# Altium PCB PCB1.PcbDoc
Units mil, origin at the board's own origin, x right, y up, seen from the top; angles counter-clockwise.
Board outline 2945 x 1570 mil, 2 copper layers (Top Layer, Bottom Layer); 85 components, 56 nets, 343 pads, 41 vias.
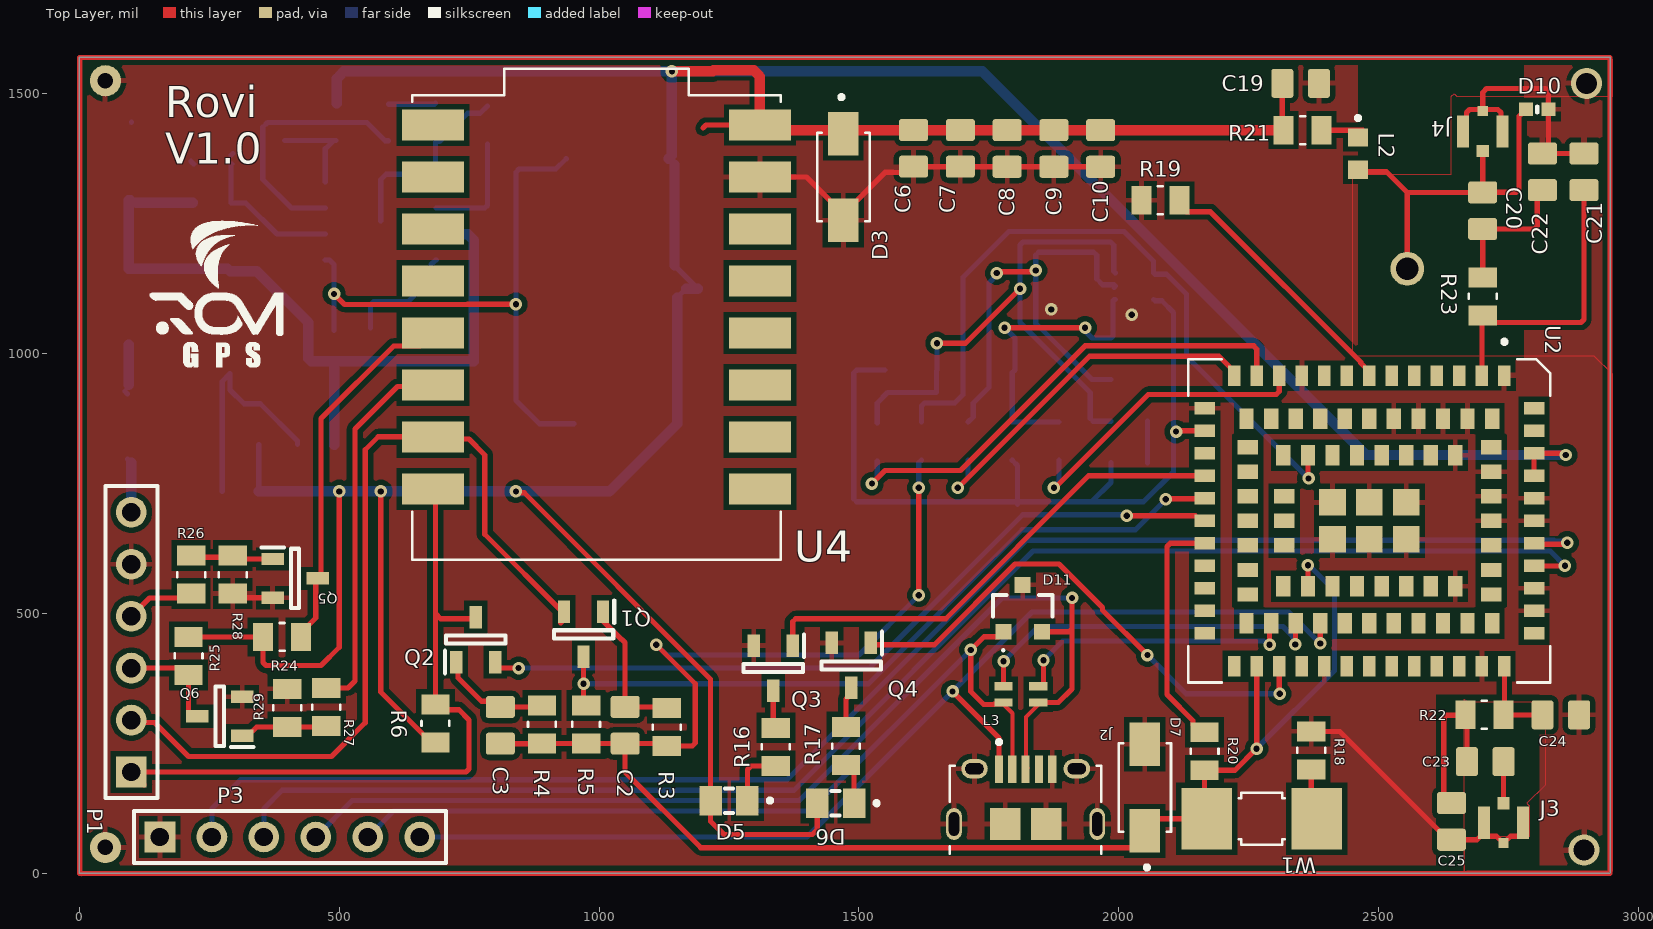
[diagram p0: Top Layer view]
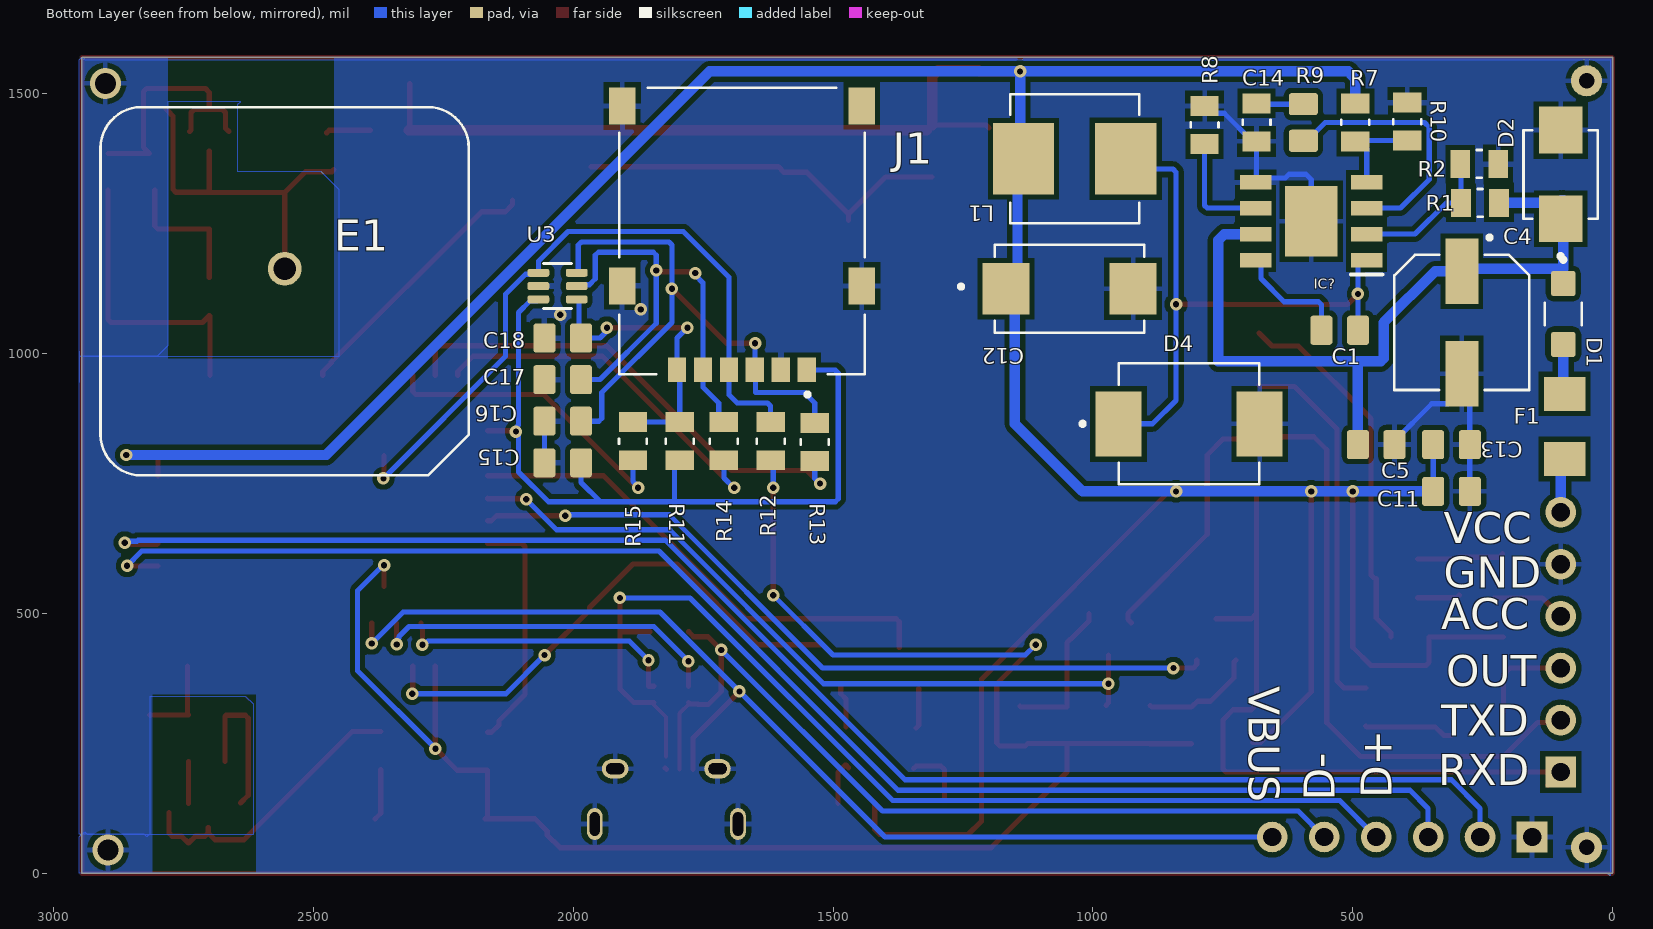
[diagram p1: Bottom Layer view, seen from below]
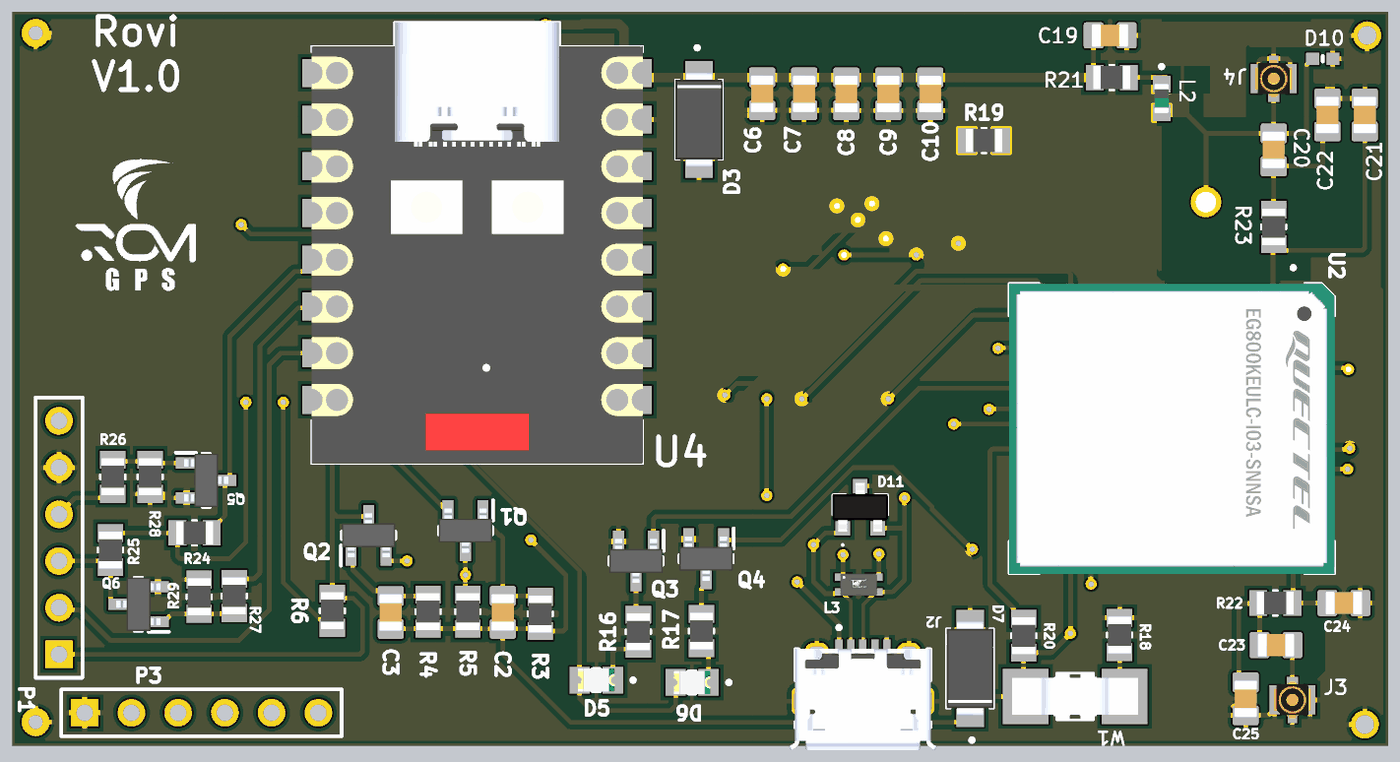
[diagram p2: 3D render of the assembled board from above, using the file's embedded part models]
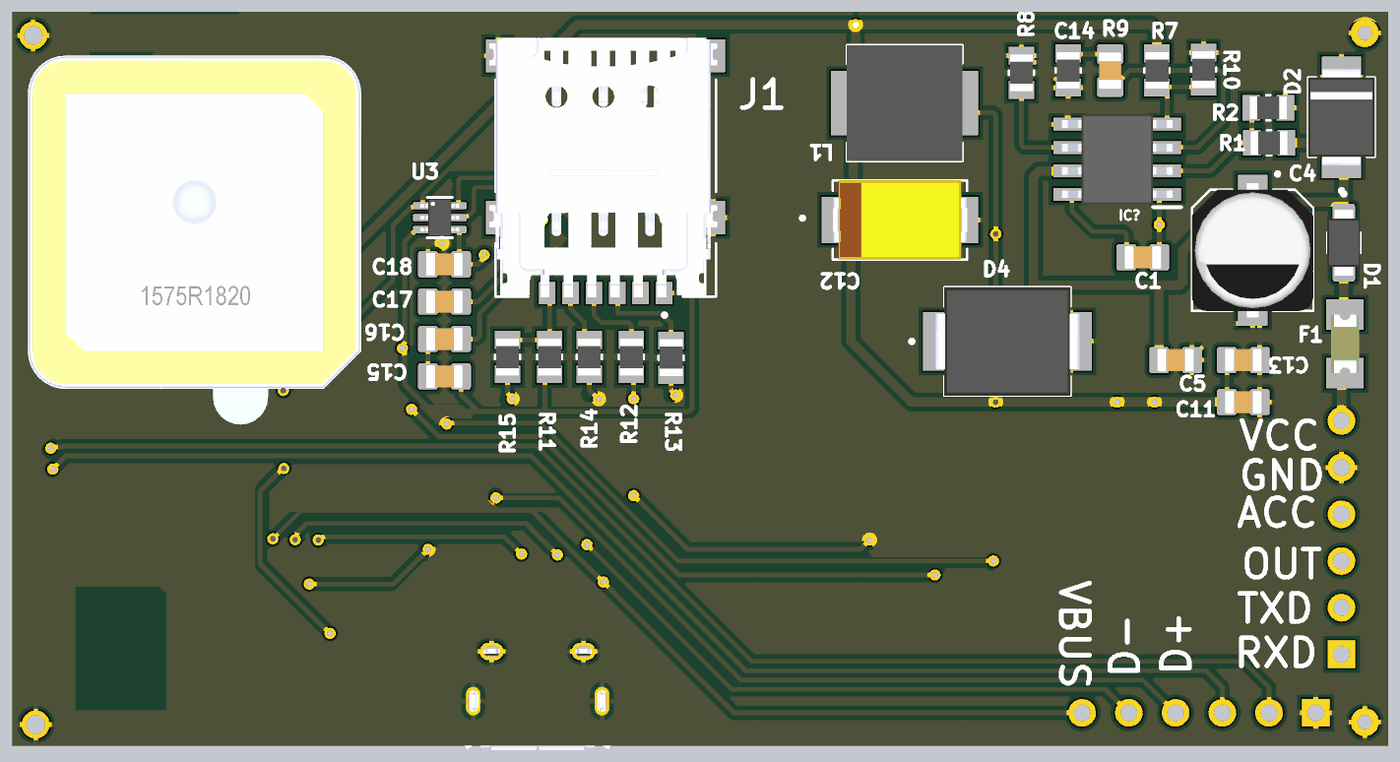
[diagram p3: 3D render of the assembled board from below, using the file's embedded part models]

## Layer stack, top to bottom
Top Solder: solder mask 0.4, Solder Resist, Dk 3.5
Top Layer: signal copper 1.4
Dielectric 1: dielectric 12.6, FR-4, Dk 4.8
Bottom Layer: signal copper 1.4
Bottom Solder: solder mask 0.4, Solder Resist, Dk 3.5

## Board outline
0,0 0,1570 2945,1570 2945,0

## Design rules (kind name [scope] priority, off if disabled: settings)
Clearance [All] p1: gap=10 ignorepadtopadclearanceinfootprint=FALSE except(0: Arc-Hole Track-Hole SMDPad-Hole THPad-Hole Via-Hole Fill-Hole Poly-Hole Region-Hole Text-Hole)
DiffPairsRouting [All] p1: maxlimit=10 minlimit=5 mostfreqgap=10 toplayer_minwidth=15 toplayer_maxwidth=15 toplayer_prefwidth=15 bottomlayer_minwidth=15 bottomlayer_maxwidth=15 bottomlayer_prefwidth=15 maxuncoupledlength=500
PolygonConnect [All] p1: connectstyle=Relief reliefconductorwidth=10 reliefentries=4 polygonreliefangle="90 Angle" airgapwidth=10
RoutingVias [All] p1: holewidth=15 width=50 viastyle="Through Hole" minholewidth=5 minwidth=15 maxholewidth=20 maxwidth=50
SolderMaskExpansion [All] p1: expansion=4 istentingtop=FALSE
Width [All] p1: maxlimit=30 minlimit=5 preferedwidth=10
29 further rules are at their usual default settings.

## Components (designator, comment, footprint, x,y, rotation, side; value= is the part's Value field where it differs from the comment)
C1 "104/50V" CAPC2012X140N 525,1045 r0 bottom
C2 "104/50v" CAPC2012X140N 1050,285 r270 top
C3 "104/50v" CAPC2012X140N 810,284.76 r270 top
C4 "10uF/35V" CAP_EEEFN1J100L 290,1060 r270 bottom
C5 "104/50V" CAPC2012X140N 455,825 r0 bottom
C6 "100uF" CAPC2012X140N 1605,1395 r90 top
C7 "100nF" CAPC2012X140N 1695,1395 r90 top
C8 "33pF" CAPC2012X140N 1785,1394.76 r90 top
C9 "10pF" CAPC2012X140N 1875,1394.76 r90 top
C10 "3.9pF" CAPC2012X140N 1965,1394.76 r90 top
C11 "1.8nF" CAPC2012X140N 310,735 r0 bottom
C12 "107" CAPMP7343X310N 1045,1125 r180 bottom
C13 "104/50V" CAPC2012X140N 310,825 r0 bottom
C14 "220pF/50V" CAPC2012X140N 595,1444.76 r270 bottom
C15 "20pF/50V" CAPC2012X140N 2020,790 r180 bottom
C16 "20pF/50V" CAPC2012X140N 2020,870 r180 bottom
C17 "20pF/50V" CAPC2012X140N 2020,950 r180 bottom
C18 "20pF/50V" CAPC2012X140N 2020,1030 r180 bottom
C19 "100pF" CAPC2012X140N 2349.76,1520 r0 top
C20 "100pF" CAPC2012X140N 2700,1275 r270 top
C21 "33pF" CAPC2012X140N 2895,1349.76 r270 top
C22 "33pF" CAPC2012X140N 2815,1349.76 r270 top
C23 "100pF" CAPC2012X140N 2705,215 r180 top
C24 "33pF" CAPC2012X140N 2850.24,305 r0 top
C25 "33pF" CAPC2012X140N 2640,100 r270 top
D1 "1N4007FLTR" SODFL3618X110N 95,1076.34 r270 bottom
D2 "SMBJ30A" DIOM4336X265N 100,1345 r90 bottom
D3 "SMAJ5.0A" DIOM4325X250N 1470,1340 r270 top
D4 "SS34" DIOM7959X265N 815,865 r180 bottom
D5 "LED" LEDC2012X70N 1250,140 r180 top
D6 "LED" LEDC2012X70N 1455,135 r180 top
D7 "SMAJ5.0A" DIOM4325X250N 2050,165 r90 top
D10 "PESD0402-240" DIONC1005X43N 2805,1470 r180 top
D11 "SM712-02HTG" SM71202HTG 1815,510 r0 top
E1 "APAE1575R1820ABDC1-T" XDCR_APAE1575R1820ABDC1-T 2555,1120 r180 bottom
F1 "04661.25NRHF" FUSC3115X66N 92.5,859.9 r90 bottom
IC? "MP2560DN-LF" SOIC127P600X170-9N 580,1255 r0 bottom
J1 "NSIM-2-C" CUI_NSIM-2-C 1675,1130 r0 bottom
J2 "USB Micro" AMPHENOL_10118194-0001LF 1820.63,95 r0 top
J3 "GSM" TE_CONMHF4-SMD-G-T 2740,97.6 r180 top
J4 "GNSS" TE_CONMHF4-SMD-G-T 2700,1427.4 r0 top
L1 "10uH" IND_LQH66SN100M03L 1035,1375 r0 bottom
L2 "47nH" INDC1608X95N 2460,1385 r90 top
L3 "744231091" WE-CNSW_08058 1811.54,344.25 r90 top
P1 "Header 6" HDR1X6 100,195 r90 top
P3 "Header 6" HDR1X6 155,70 r0 top
Q1 "C1815" SOT95P240X110-3N 970,459.96 r270 top
Q2 "C1815" SOT95P240X110-3N 762.6,449.96 r90 top
Q3 "C1815" SOT95P240X110-3N 1335,395 r270 top
Q4 "C1815" SOT95P240X110-3N 1485,400 r270 top
Q5 "C1815" SOT95P240X110-3N 414.96,567.6 r0 top
Q6 "C1815" SOT95P240X110-3N 270.04,302.4 r180 top
R1 "NC" RESC2012X65N 255,1290 r0 bottom
R2 "NC" RESC2012X65N 256.61,1365 r180 bottom
R3 "4.7K" RESC2012X65N 1130,281.61 r270 top
R4 "4.7K" RESC2012X65N 890,286.61 r270 top
R5 "10K" RESC2012X65N 975,286.61 r270 top
R6 "10K" RESC2012X65N 685,288.39 r270 top
R7 "130K" RESC2012X65N 495,1445 r90 bottom
R8 "200K" RESC2012X65N 785,1440 r270 bottom
R9 "68K" RESC2012X65N 685,1445 r90 bottom
R10 "33K" RESC2012X65N 395,1446.61 r270 bottom
R11 "51K" RESC2012X65N 1795,831.61 r90 bottom
R12 "51K" RESC2012X65N 1620,831.61 r90 bottom
R13 "0R." RESC2012X65N 1535,830 r90 bottom
R14 "0R." RESC2012X65N 1710,831.61 r90 bottom
R15 "0R." RESC2012X65N 1885,831.61 r90 bottom
R16 "2.2K" RESC2012X65N 1340,243.39 r270 top
R17 "2.2K" RESC2012X65N 1475,245 r270 top
R18 "4.7K" RESC2012X65N 2370,236.61 r90 top
R19 "4.7K" RESC2012X65N 2080,1295 r180 top
R20 "4.7K" RESC2012X65N 2165,235 r90 top
R21 "10" RESC2012X65N 2353.39,1430 r180 top
R22 "0R" RESC2012X65N 2703.39,305 r0 top
R23 "0R" RESC2012X65N 2700,1110 r270 top
R24 "10k" RESC2012X65N 390,455 r180 top
R25 "10k" RESC2012X65N 210,418.39 r90 top
R26 "1k" RESC2012X65N 215,575 r270 top
R27 "1k" RESC2012X65N 475,320 r90 top
R28 "10k" RESC2012X65N 295,575 r90 top
R29 "10k" RESC2012X65N 400,318.39 r270 top
U2 "EG800KEULC-I03-SNNSA" XCVR_EG800KEULC-I03-SNNSA 2481.93,678.31 r270 top
U3 "SMF05CT1G" SOT65P210X110-6N 2030,1130 r180 bottom
U4 "ESP32-C3_SUPERMINI_SMD" MODULE_ESP32-C3_SUPERMINI 995,1050 r0 top
W1 "test points" KEYSTONE_5102 2275,105 r180 top

## Footprints (in the part's own frame and the unit in brackets; to place one, negate y for a bottom-side part, rotate by r counter-clockwise, add the part's x,y. Pads: shape width x height; smd on the part's side, far side on the other; paste and mask are expansions set on the pad)
AMPHENOL_10118194-0001LF [mm]
  rect 0.4x1.35 smd: 1(-1.3,2.675) 2(-0.65,2.675) 3(0,2.675) 4(0.65,2.675) 5(1.3,2.675)
  oval 0.775x1.55 hole 0.5 slot 1.15 at 90 deg mask+0: SH1(-3.5,0) SH4(3.5,0)
  rect 1.5x1.55 smd: SH2(1,0) SH3(-1,0)
  oval 1.3x0.95 hole 0.55 slot 0.9 at 0 deg: SH5(-2.5,2.7) SH6(2.5,2.7)
  silkscreen extent -3.7,-1.45 3.7,4.1, body extent -4.02,-2.68 4.02,2.85, height 2.67
CAP_EEEFN1J100L [mm]
  rect 3.2x1.6 smd: 1(-2.5,0) 2(2.5,0)
  silkscreen extent -4.25,-3.3 3.3,3.3, body extent -3.65,-3.3 3.65,3.3, height 5.8
CAPC2012X140N [mm]
  rrect25% 1.08x1.42 smd: 1(-0.895,0) 2(0.895,0)
  body extent -1,-0.63 1,0.62, height 1.4
CAPMP7343X310N [mm]
  rect 2.3x2.52 smd: 1(-3.11,0) 2(3.11,0)
  silkscreen extent -5.4,-2.15 3.65,2.15, body extent -3.65,-2.15 3.65,2.15, height 3.1
CUI_NSIM-2-C [mm]
  rect 0.9x1.2 smd: C1(-3.17,4.1) C2(-0.63,4.1) C3(1.91,4.1) C5(-1.9,4.1) C6(0.64,4.1) C7(3.18,4.1)
  rect 1.3x1.8 smd: S/W(-5.85,-8.8) SH1(-5.85,0) SH2(5.85,0) SH3(5.85,-8.8)
  silkscreen extent -6,-9.7 6,5.4, body extent -6.07,-9.78 6.33,4.32, height 1.45
DIOM4325X250N [mm]
  rect 2.12x1.5 smd: A(2.115,0) C(-2.115,0)
  silkscreen extent -4,-1.28 2.16,1.28, body extent -2.57,-1.28 2.57,1.28, height 2.5
DIOM4336X265N [mm]
  rect 2.28x2.12 smd: A(2.165,0) C(-2.165,0)
  silkscreen extent -4.1,-1.81 2.16,1.81, body extent -2.68,-1.81 2.68,1.81, height 2.65
DIOM7959X265N [mm]
  rect 2.25x3.18 smd: A(3.455,0) C(-3.455,0)
  silkscreen extent -5.3,-2.95 3.44,2.95, body extent -3.97,-2.95 3.98,2.95, height 2.65
DIONC1005X43N [mm]
  rect 0.7x0.65 smd: 1(-0.55,0) 2(0.55,0)
  silkscreen extent 0,-0.15 0,0.15
FUSC3115X66N [mm]
  rect 1.65x2.03 smd: 1(-1.59,0) 2(1.59,0)
  body extent -1.59,-0.76 1.59,0.76, height 0.66
HDR1X6 [mm] "Connector; Header; 6 Position"
  rect 1.5x1.5 hole 0.9: 1(0,0)
  round 1.5 hole 0.9: 2(2.54,0) 3(5.08,0) 4(7.62,0) 5(10.16,0) 6(12.7,0)
  silkscreen extent -1.27,-1.27 13.97,1.27
IND_LQH66SN100M03L [mm]
  rect 3x3.5 smd: 1(-2.5,0) 2(2.5,0)
  silkscreen extent -3.15,-3.15 3.15,3.15, body extent -3.15,-3.15 3.15,3.15, height 5
INDC1608X95N [mm]
  rect 0.9x0.97 smd: 1(-0.785,0) 2(0.785,0)
  silkscreen extent 1.64,-0.1 1.83,0.1, body extent -0.8,-0.4 0.8,0.4, height 0.95
KEYSTONE_5102 [mm]
  rect 2.475x3 smd: 1(-2.687,0) 2(2.688,0)
  silkscreen extent -1.13,-1.27 1.13,1.27, body extent -3.42,-1.27 3.42,1.27, height 1
LEDC2012X70N [mm]
  rect 1.1x1.45 smd: A(0.9,0) C(-0.9,0)
  silkscreen extent -2.1,-0.6 0.2,0.6, body extent -1,-0.63 1,0.63, height 0.7
MODULE_ESP32-C3_SUPERMINI [mm]
  rect 3.025x1.524 smd: 0(7.985,-7.88) 1(7.985,-5.34) 2(7.985,-2.8) 3(7.985,-0.26) 3.3(7.985,4.82) 4(7.985,2.28) 5(-7.985,9.9) 5V(7.985,9.9) 6(-7.985,7.36) 7(-7.985,4.82) 8(-7.985,2.28) 9(-7.985,-0.26) 10(-7.985,-2.8) 20(-7.985,-5.34) 21(-7.985,-7.88) G(7.985,7.36)
  silkscreen extent -9,-11.35 9,12.65, body extent -9,-11.35 9,12.65, height 4.16
RESC2012X65N [mm]
  rect 0.97x1.38 smd: 1(-0.93,0) 2(0.93,0)
  silkscreen extent -0.12,-0.68 0.12,0.68, body extent -1,-0.62 1,0.62, height 0.65
SM71202HTG [mm]
  rect 0.78x0.78 smd: 1(-0.95,-1.145) 2(0.95,-1.145) 3(0,1.145)
  silkscreen extent -1.46,-2.1 1.46,0.65, body extent -1.52,-1.32 1.52,1.32, height 1.12
SODFL3618X110N [mm]
  rrect25% 1.24x1.22 smd: 1(-1.49,0) 2(1.49,0)
  silkscreen extent -2.75,-0.9 0.55,0.9, body extent -1.8,-0.9 1.8,0.9, height 1.1
SOIC127P600X170-9N [mm]
  rect 1.525x0.7 smd: 1(-2.712,1.905) 2(-2.712,0.635) 3(-2.712,-0.635) 4(-2.712,-1.905) 5(2.712,-1.905) 6(2.712,-0.635) 7(2.712,0.635) 8(2.712,1.905)
  rect 2.56x3.45 smd: 9(0,0)
  silkscreen extent -3.47,2.61 -1.95,2.61, body extent -3,-2.45 3,2.45, height 1.7
SOT65P210X110-6N [mm]
  rrect50% 1.06x0.39 smd: 1(-0.935,0.65) 2(-0.935,0) 3(-0.935,-0.65) 4(0.935,-0.65) 5(0.935,0) 6(0.935,0.65)
  silkscreen extent -0.68,-1.1 0.68,1.1, body extent -1.05,-1 1.05,1, height 1.1
SOT95P240X110-3N [mm]
  rect 1.1x0.6 smd: 1(-1.1,0.95) 2(-1.1,-0.95) 3(1.1,0)
  silkscreen extent -1.65,-1.45 0.2,1.5, body extent -1.2,-1.45 1.2,1.45, height 1.1
TE_CONMHF4-SMD-G-T [mm]
  rect 0.6x0.6 smd: 1(0,-0.95)
  rect 0.58x1.58 smd: 2(-0.96,0) 3(0.96,0)
  rect 0.5x0.5 smd: 4(0,1)
  body extent -1,-1 1,1, height 0.6
WE-CNSW_08058 [mm]
  rect 0.4x0.9 smd: 1(-0.4,-0.85) 2(-0.4,0.85) 3(0.4,0.85) 4(0.4,-0.85)
  body extent -0.6,-1 0.6,1, height 1.21
XCVR_EG800KEULC-I03-SNNSA [mm]
  rect 1x0.6 smd paste-1: 1(-7.1,6.6) 2(-7.1,5.5) 3(-7.1,4.4) 4(-7.1,3.3) 5(-7.1,2.2) 6(-7.1,1.1) 7(-7.1,0) 8(-7.1,-1.1) 9(-7.1,-2.2) 10(-7.1,-3.3) 11(-7.1,-4.4) 12(-7.1,-5.5) 13(-7.1,-6.6) 23(7.1,-6.6) 24(7.1,-5.5) 25(7.1,-4.4) 26(7.1,-3.3) 27(7.1,-2.2) 28(7.1,-1.1) 29(7.1,0) 30(7.1,1.1) 31(7.1,2.2) 32(7.1,3.3) 33(7.1,4.4) 34(7.1,5.5) 35(7.1,6.6)
  rect 0.6x1 smd paste-1: 14(-4.4,-8.05) 15(-3.3,-8.05) 16(-2.2,-8.05) 17(-1.1,-8.05) 18(0,-8.05) 19(1.1,-8.05) 20(2.2,-8.05) 21(3.3,-8.05) 22(4.4,-8.05) 36(4.4,8.05) 37(3.3,8.05) 38(2.2,8.05) 39(1.1,8.05) 40(0,8.05) 41(-1.1,8.05) 42(-2.2,8.05) 43(-3.3,8.05) 44(-4.4,8.05) 95(-5.5,-8.05) 96(5.5,-8.05) 97(5.5,8.05) 98(-5.5,8.05)
  rect 1x0.7 smd paste-1: 45(-5,4.8) 46(-5,3.6) 47(-5,2.4) 48(-5,1.2) 49(-5,0) 50(-5,-1.2) 51(-5,-2.4) 52(-5,-3.6) 53(-5,-4.8) 59(5,-4.8) 60(5,-3.6) 61(5,-2.4) 62(5,-1.2) 63(5,0) 64(5,1.2) 65(5,2.4) 66(5,3.6) 67(5,4.8) 73(-3.2,4.2) 74(-3.2,3) 75(-3.2,1.8) 76(-3.2,0.6) 77(-3.2,-0.6) 78(-3.2,-1.8) 79(-3.2,-3) 80(-3.2,-4.2) 81(3.2,-4.2) 82(3.2,-3) 83(3.2,-1.8) 84(3.2,-0.6) 85(3.2,0.6) 86(3.2,1.8) 87(3.2,3) 88(3.2,4.2) 99(-5,6) 100(-5,-6) 103(5,-6) 104(5,6)
  rect 0.7x1 smd paste-1: 54(-2.4,-5.95) 55(-1.2,-5.95) 56(0,-5.95) 57(1.2,-5.95) 58(2.4,-5.95) 68(2.4,5.95) 69(1.2,5.95) 70(0,5.95) 71(-1.2,5.95) 72(-2.4,5.95) 101(-3.6,-5.95) 102(3.6,-5.95) 105(3.6,5.95) 106(-3.6,5.95) 107(-1.2,-4.15) 108(0,-4.15) 109(1.2,-4.15)
  rect 1.3x1.3 smd paste-0.116: 89(-0.9,1.8) 90(-0.9,0) 91(-0.9,-1.8) 92(0.9,-1.8) 93(0.9,0) 94(0.9,1.8)
  silkscreen extent -8.85,-8.85 7.9,8.85, body extent -7.9,-8.85 7.9,8.85, height 2.6
XDCR_APAE1575R1820ABDC1-T [mm]
  round 1.65 hole 1.1: 1(0,1.1)
  silkscreen extent -9,-9 9,9, body extent -9,-11 9,9, height 3.1

## Part data
C1 C2 C3 C5 C13: library part CL21A226MQQNNNG, "Capacitors 104 100nF 0805 50V 10%", Package=None, Availability=Unavailable, MF="{'manufacturer': u'Samsung Electro-Mechanics'}", MP=CL21A226MQQNNNG, Price=None
C4: library part EEEFN1J100L, "luminum Electrolytic Capacitors - SMD 63VDC 10uF 20% 6.3x5.8mm AEC-Q200", Package=None, Availability=Unavailable, MF="{'manufacturer': u'Panasonic'}", MP=EEEFN1J100L, Price=None
C6 C7 C8 C10 C11 C15 C16 C17 C18 C19 C20 C21 C22: library part CL21A226MQQNNNG, "Capacitors 0805", Package=None, Availability=Unavailable, MF="{'manufacturer': u'Samsung Electro-Mechanics'}", MP=CL21A226MQQNNNG, Price=None
C9: library part CL21A226MQQNNNG, "Capacitors 0805 50V 10%", Package=None, Availability=Unavailable, MF="{'manufacturer': u'Samsung Electro-Mechanics'}", MP=CL21A226MQQNNNG, Price=None
C12: library part TAJD107K016RNJV, "Tantalum Capacitors - Solid SMD 16V 100uF 2917 ESR=6 00mOhms 10%", Package=None, Availability=Unavailable, MF="{'manufacturer': u'AVX'}", MP=TAJD107K016RNJV, Price=None
C14: library part CL21A226MQQNNNG, "Capacitors 220pF 0805 50V 10%", Package=None, Availability=Unavailable, MF="{'manufacturer': u'Samsung Electro-Mechanics'}", MP=CL21A226MQQNNNG, Price=None
C23 C24 C25: library part CL21A226MQQNNNG, Package=None, Availability=Unavailable, MF="{'manufacturer': u'Samsung Electro-Mechanics'}", MP=CL21A226MQQNNNG, Price=None
D1: "1N4007FLTR STANDARD RECTIFIER 1000V SOD-123", Package=None, Availability=Unavailable, MF="{'manufacturer': u'SMC Diode Solutions'}", MP=1N4007FLTR, Price=None
D2 D7 E1 J1 U3 U4: Package=None, Availability=Unavailable, Price=None
  D2: MF="{'manufacturer': u'STMicroelectronics'}", MP=SMBJ30A
  D7: MF="{'manufacturer': u'Taiwan Semiconductor'}", MP=SMAJ5.0A
  E1: MF="{'manufacturer': u'Abracon'}", MP=APAE1575R1820ABDC1-T
  J1: MF="{'manufacturer': u'Same Sky'}", MP=NSIM-2-C
  U3: MF="{'manufacturer': u'ON Semiconductor'}", MP=SMF05CT1G
  U4: MF="{'manufacturer': u'Espressif Systems'}", MP=ESP32-C3_SUPERMINI_SMD
D3: "SMAJ5.0A TVS DIODE 5VWM 9.2VC SMA(DO-214AC)", Package=None, Availability=Unavailable, MF="{'manufacturer': u'Taiwan Semiconductor'}", MP=SMAJ5.0A, Price=None
D4: "SS34 Diode Schottky 3A 40V SMA(DO-214AC)", Package=None, Availability=Unavailable, MF="{'manufacturer': u'onsemi'}", MP=SS34, Price=None
D5 D6: library part 597-3305-607F, Package=None, Availability=Unavailable, MF="{'manufacturer': u'Dialight'}", MP=597-3305-607F, Price=None
D10: "Polymer ESD PESD line of devices", Package=None, Check_prices=https://www.snapeda.com/parts/PESD0402-240/Ersa/view-part/?ref=eda, MF=Littelfuse, MP=PESD0402-240, SnapEDA_Link=https://www.snapeda.com/parts/PESD0402-240/Ersa/view-part/?ref=snap
D11: "TVS Diode (Bi-directional)", Manufacturer_Name=LITTELFUSE, Mouser Part Number=576-SM712-02HTG, Arrow Part Number=SM712-02HTG, Arrow Price/Stock=https://www.arrow.com/en/products/sm712-02htg/littelfuse?utm_currency=USD&region=nac, Datasheet Link=https://www.littelfuse.com/media?resourcetype=datasheets&itemid=a4019802-ff62-41ff-bf66-295f97422f81&filename=littelfuse-tvs-diode-array-sm712-datasheet, Height=1.12mm, Manufacturer_Part_Number=SM712-02HTG, Mouser Price/Stock=https://www.mouser.co.uk/ProductDetail/Littelfuse/SM712-02HTG?qs=aGgfWYEhH7lQgBVBPCUDkw%3D%3D
F1: "Surface Mount Fuses 63V 1.25A FA SLIM", Package=None, Availability=Unavailable, MF="{'manufacturer': u'Littelfuse'}", MP=04661.25NRHF, Price=None
IC?: "Integrated Circuit", Manufacturer_Name="Monolithic Power Systems (MPS)", Mouser Part Number=946-MP2560DNLF, Datasheet Link=http://www.monolithicpower.com/DesktopModules/DocumentManage/API/Document/getDocument?id=1798, Height=1.7mm, Manufacturer_Part_Number=MP2560DN-LF, Mouser Price/Stock=https://www.mouser.co.uk/ProductDetail/Monolithic-Power-Systems-MPS/MP2560DN-LF?qs=rC7bBWoQAAleyiym%2FnQvhQ%3D%3D
J2: library part 10118194-0001LF, Package=None, Availability=Unavailable, MF="{'manufacturer': u'Amphenol ICC (FCI)'}", MP=10118194-0001LF, Price=None
J3 J4: library part CONMHF4-SMD-G-T, Package=None, Availability=Unavailable, MF="{'manufacturer': u'Linx Technologies Inc.'}", MP=CONMHF4-SMD-G-T, Price=None
L1: library part LQH66SN100M03L, "RF Inductors - SMD 10 UH 20%", Package=None, Availability=Unavailable, MF="{'manufacturer': u'Murata'}", MP=LQH66SN100M03L, Price=None
L2: library part LQG18HH47NJ00D, Package=None, Availability=Unavailable, MF="{'manufacturer': u'Murata Electronics'}", MP=LQG18HH47NJ00D, Price=None
L3: "Inductor", Manufacturer_Name="Wurth Elektronik", Mouser Part Number=710-744231091, Datasheet Link=http://componentsearchengine.com/Datasheets/1/744231091.pdf, Manufacturer_Part_Number=744231091, Mouser Price/Stock=https://www.mouser.co.uk/ProductDetail/Wurth-Elektronik/744231091?qs=PGXP4M47uW7beLYOUbZm8Q%3D%3D
P1 P3: "Header, 6-Pin", LatestRevisionDate=17-Jul-2002, LatestRevisionNote="Re-released for DXP Platform.", Publisher="Altium Limited"
Q1 Q2 Q3 Q4 Q5 Q6: "Transistor BJT NPN", Manufacturer_Name=Rectron, Datasheet Link=https://4donline.ihs.com/images/VipMasterIC/IC/RECT/RECTS01160/RECTS01160-1.pdf?hkey=EF798316E3902B6ED9A73243A3159BB0, Height=1.1mm, Manufacturer_Part_Number=C1815
R1 R2 R3 R4 R5 R6 R7 R8 R9 R10 R11 R12 R13 R14 R15 R16 R17 R18 R19 R20 R21 R22 R23 R24 R25 R26 R27 R28 R29: library part MCR10EZHJ103, "Resistor 0808", Package=None, Availability=Unavailable, MF="{'manufacturer': u'Rohm'}", MP=MCR10EZHJ103, Price=None
U2: "Quectel Wireless Solutions LTE Cat 1.bis, w/o GNSS & BT, w/o VoLTE, w/ DFOTA. Wi-Fi scan, USB 2.0 interface", Package=None, Check_prices=https://www.snapeda.com/parts/EG800KEULC-I03-SNNSA/Quectel/view-part/?ref=eda, MF=Quectel, MP=EG800KEULC-I03-SNNSA, SnapEDA_Link=https://www.snapeda.com/parts/EG800KEULC-I03-SNNSA/Quectel/view-part/?ref=snap
W1: library part 5102, Package=None, Availability=Unavailable, MF="{'manufacturer': u'Keystone'}", MP=5102, Price=None

## Free pads (board coordinates)
  round 60 hole 30: 38(50,1525) 39(50,50)
  round 60 hole 40: 40(2895,45) 41(2900,1520)

## Via types
v1: diameter 24, hole 12, Top Layer to Bottom Layer, 41 vias

## Nets (pads, with @x,y where several pads share a name; then routed paths per layer and width w, separated by ;. In a path a pad name is that pad's centre, name@x,y a point inside that pad or via, vN(x,y) a via of type N, cw(c..) or ccw(c..) an arc to the next point about the centre after c; other vN are vias at no path point)
ACC: P1.4 R26.2 | length 142.9
  Top Layer w10: P1.4 135,530 R26.2@228.39,530
ANT_GNSS: C21.2 R23.2 U2.2 | length 567.8
  Top Layer w10: U2.2 2698.46,1071.85 R23.2 2713.39,1060 2889.14,1060 2895,1065.86 C21.2
ANT_GSM: C24.1 R22.2 U2.35 | length 169.5
  Top Layer w10: U2.35 2741.77,306.77 R22.2 C24.1
DBG_RXD: P3.3 U2.38 | length 2836.2
  Top Layer w10: U2.38 v1@2859.14,591.69
  Bottom Layer w10: P3.3 355,125 390,160 1375,160 1835,620 2830,620 v1(2858.31,591.69) v1@2859.14,591.69
DBG_TXD: P3.2 U2.39 | length 2943.6
  Top Layer w10: U2.39 2800.74,633.12 v1@2863.3,633.12
  Bottom Layer w10: P3.2 255,125 310,180 1361.57,180 1822.57,641 2837.28,641 2839.24,639.05 2860.01,639.05 v1(2862.69,636.37)
GIPO9: Q5.3 R24.1 U4.9 | length 721.8
  Top Layer w10: R24.1 426.61,463.07 454.92,491.38 454.92,567.6 458.39,567.6 465,574.21 465,875 604.76,1014.76 655.63,1014.76 U4.9
GIPO10: R27.2 U4.10 | length 731.3
  Top Layer w10: R27.2 516.61,356.61 530,370 530,855 611.94,936.94 677.81,936.94 U4.10
GND: C4.2 C5.1 C6.1 C7.1 C8.1 C9.1 C10.1 C11.1 C12.2 C13.1 C15.1 C16.1 C17.1 C18.1 C19.2 C21.1 C22.1 C24.2 C25.2 D2.A D3.A D4.A D7.A D10.1 D11.3 IC?.5 IC?.9 J1.C5 J1.SH1 J1.SH2 J1.SH3 J2.5 J2.SH1 J2.SH2 J2.SH3 J2.SH4 J2.SH5 J2.SH6 J3.2 J3.3 J3.4 J4.2 J4.3 J4.4 P1.5 P3.1 pad.38 pad.39 pad.40 pad.41 Q3.2 Q4.2 Q5.2 Q6.2 R2.2 R8.1 R9.1 R10.1 R18.2 R19.2 R28.1 R29.1 U2.1 U2.10 U2.27 U2.34 U2.36 U2.37 U2.40 U2.41 U2.45 U2.46 U2.47 U2.48 U2.70 U2.71 U2.72 U2.73 U2.88 U2.89 U2.90 U2.91 U2.92 U2.93 U2.94 U2.95 U3.2 U4.G | length 2829.1
  Top Layer w10: R28.1@295,535 299.8,530.2 Q5.2@375,530.2 ; U4.G 1399.17,1339.76 D3.A@1470,1268.94 ; D3.A D3.A@1470,1268.94 ; C10.1 C9.1 C8.1 1784.88,1359.65 1695.12,1359.65 C7.1 C6.1 1594.06,1348.82 1549.88,1348.82 D3.A@1470,1268.94 ; R18.2 2424.84,273.23 2633.31,64.76 C25.2 2689.06,64.76 J3.3@2702.2,77.91 ; J4.2 2668.62,1433.82 2668.62,1464.14 2674.48,1470 J4.4@2700,1470 ; J3.3@2702.2,87.76 J3.3@2702.2,77.91 ; J4.3 2735,1430.2 2735,1464.14 2729.14,1470 2701.61,1470 2700,1471.61 2700,1502.33 2707.67,1510 2820.8,1510 2826.65,1504.14 D10.1 2826.65,1396.65 C22.1 C21.1 ; J3.2@2777.8,117.28 J3.2 2777.8,77.91 2771.38,71.5 2753.27,71.5 J3.4 2726.73,71.5 2708.62,71.5 J3.3@2702.2,77.91
  Bottom Layer w10: D2.A@100,1445.24 D2.A@100.24,1445 ; R2.2@215,1370 R2.2 ; C11.1 C13.1 274.76,946.34 C4.2 290,930.08 316.5,903.58 347.87,903.58 419.76,831.69 C5.1 ; IC?.9 580,1335 590,1345 622.77,1345 629.85,1337.91 678.86,1337.91 IC?.5@685,1331.77 ; IC?.5 IC?.5@685,1331.77 ; R8.1 770.91,1462.52 747.2,1462.52 693.07,1408.39 R9.1 IC?.5@685,1331.77 ; C15.1 2055.24,830 C16.1
  other v1: 2025,1075 1870,1085
MAIN_DTR: R20.2 U2.19 | length 467.2
  Top Layer w10: R20.2 2156.93,271.61 2142.83,285.71 2142.83,293.78 2092.5,344.11 2092.5,629.14 2098.36,635 U2.19
MAIN_RXD: Q1.3 R5.1 U2.17 | length 1441.6
  Top Layer w10: Q1.3@970,420 v1(970,365) 970,328.23 R5.1 ; v1(2090.37,719.63) 2091.54,720.81 2164.19,720.81 U2.17
  Bottom Layer w10: v1(970,365) 1518.28,365 1814.28,661 2031.73,661 v1(2090.37,719.63)
MAIN_TXD: Q2.2 U2.18 | length 1503.2
  Top Layer w10: Q2.2@800,410 800,401.61 806.61,395 v1(845,395) ; v1(2015,688) 2147.43,688 2157.13,678.31 U2.18
  Bottom Layer w10: v1(845,395) 1520,395 1815,690 2013,690 v1(2015,688)
NET_STATUS: Q3.1 U2.16 | length 958.1
  Top Layer w10: Q3.1@1372.4,434.96 1372.4,484.14 1378.26,490 1666.82,490 1941.74,764.92 U2.16
NetC1_1: C1.1 D4.C IC?.1 L1.1 | length 1181.3
  Top Layer w10: v1(490,1115) 510.24,1094.76 746.39,1094.76 746.63,1095 v1(840,1095)
  Bottom Layer w10: IC?.1 481.22,1180 490,1171.22 490,1045.24 C1.1 ; L1.1 916.57,1355 845.86,1355 840,1349.14 840,910 885,865 D4.C
NetC1_2: C1.2 IC?.8 | length 222.1
  Bottom Layer w10: C1.2@560.24,1050 560,1050.24 560,1094.14 565.86,1100 632,1100 676.75,1144.75 676.75,1171.22 685.53,1180 IC?.8
NetC2_1: C2.1 Q1.1 R3.1 | length 288.6
  Top Layer w10: Q1.1@1007.4,499.92 1007.4,485.55 1042.95,450 1044.14,450 1050,444.14 C2.1 1138.62,320.24 R3.1@1140,321.61
NetC3_1: C3.1 Q2.1 R4.1 | length 221.1
  Top Layer w10: Q2.1@725.2,410 728.65,406.54 728.65,376.35 773.84,331.16 798.84,331.16 C3.1 886.77,320 R4.1
NetC4_1: C4.1 C5.2 D1.1 D2.C IC?.7 R1.1 | length 1502.8
  Bottom Layer w10: D2.C@95,1295 100,1300 D2.C@110,1290 ; 440,990.86 445.86,985 ; 490,985 490.24,984.76
  Bottom Layer w20: D2.C@95,1295 95,1163.66 C4.1@284.76,1163.66 ; D2.C@110,1290 R1.1 ; C4.1 341.57,1158.43 440,1060 440,990.86 ; 445.86,985 490,985 759.14,985 759.14,1218.28 747.43,1230 IC?.7 ; C5.2 490.24,984.76
NetC14_1: C14.1 R9.2 | length 90.7
  Bottom Layer w10: C14.1 683.39,1480 R9.2
NetC14_2: C14.2 IC?.3 | length 504.6
  Bottom Layer w10: IC?.3 407.83,1280 352.83,1335 352.83,1435.71 362.12,1445 552.84,1445 588.31,1409.53 C14.2
NetC16_2: C16.2 J1.C2 R13.2 U3.6 | length 1131.2
  Top Layer w10: v1(1650,1020) 1705,1020 v1(1810,1125)
  Bottom Layer w10: R13.2 1535,905 1555,925 1649.14,925 1649.14,967.53 J1.C2 1650,968.78 v1(1650,1020) ; C16.2 1950.86,870 1945,875.86 1945,925 1810,1060 1810,1209.14 1815.86,1215 1984.14,1215 1990,1209.14 1990,1158.27 1992.68,1155.59 U3.6
NetC17_2: C17.2 J1.C3 R14.2 U3.5 | length 919.9
  Top Layer w10: v1(1765,1155) 1767.5,1157.5 1837.5,1157.5 v1(1840,1160)
  Bottom Layer w10: R14.2 1720,878.23 1720,905 1750.2,935.2 J1.C3 1750,968.78 1750,1136.21 1765,1151.21 v1(1765,1155) ; C17.2 1948.5,950 1840,1058.5 v1(1840,1160) 1840,1189.14 1845.86,1195 1951.46,1195 1957.32,1189.14 1957.32,1143.95 1968.59,1132.68 1990.51,1132.68 U3.5 U3.5@1990.51,1127.32
NetC18_2: C18.2 J1.C7 R11.2 R15.2 U3.4 | length 578.3
  Top Layer w10: v1(1780,1050) v1(1935,1050)
  Bottom Layer w10: v1(1780,1050) 1800.2,1029.8 J1.C7 1795,963.39 R11.2 R15.2 ; v1(1935,1050) 1937.68,1047.32 1937.68,1040.83 1948.5,1030 C18.2 1988.43,1033.67 1988.43,1101.73 1991.11,1104.41 U3.4
NetC20_1: C20.1 D10.2 E1.1 J4.1 L2.1 | length 717.2
  Top Layer w10: L2.1 2464.09,1350 2515.24,1350 2555,1310.24 ; E1.1 2555,1310.24 ; C20.1@2700,1310.35 2764.14,1310.35 2770,1316.21 2770,1456.65 2774.57,1461.22 2774.57,1462.2 2782.36,1470 D10.2 ; J4.1 C20.1 2555,1310.24
NetC20_2: C20.2 C22.2 R23.1 | length 269.3
  Top Layer w10: R23.1 C20.2 2700.24,1240 2799.14,1240 2805,1245.86 C22.2@2805,1314.53
NetC23_1: C23.1 J3.1 | length 80.1
  Top Layer w10: J3.1 2740,214.76 C23.1
NetC23_2: C23.2 C25.1 R22.1 | length 304.3
  Top Layer w10: C25.1 2625,150.24 2625,298.28 2630.86,304.14 2666.77,304.14 2667.63,304.14 2669.76,302.01 C23.2
NetD1_2: D1.2 F1.2 | length 84.7
  Bottom Layer w10: F1.2@87.5,927.5 F1.2
  Bottom Layer w20: F1.2@95,940 D1.2
NetD5_C: D5.C R16.2 | length 124.2
  Top Layer w10: D5.C 1285.43,199.57 1292.64,206.77 R16.2 R16.2@1345,201.77
NetD6_C: D6.C R17.2 | length 87.6
  Top Layer w10: R17.2@1470,203.39 R17.2 1476.34,208.39 1490.43,194.29 D6.C
NetIC?_2: IC?.2 R1.2 R2.1 | length 286.9
  Bottom Layer w10: R2.1@291.61,1381.61 R2.1@295,1385 ; R2.1 291.61,1363.39 R1.2 320,1290 380,1230 IC?.2
NetIC?_4: IC?.4 R7.1 R10.2 | length 184.9
  Bottom Layer w10: R10.2 R7.1@488.94,1410 ; IC?.4 473.23,1394.29 R7.1@488.94,1410 ; R7.1@493.39,1410 R7.1@488.94,1410
NetIC?_6: IC?.6 R8.2 | length 218.7
  Bottom Layer w10: IC?.6 780,1280 785,1285 R8.2
NetL2_2: L2.2 R21.1 | length 86.2
  Top Layer w10: R21.1 2469.09,1430 L2.2@2474.09,1425
NetQ3_3: Q3.3 R16.1 | length 77.1
  Top Layer w10: Q3.3@1335,355.04 1335,285 R16.1
NetQ4_3: Q4.3 R17.1 | length 82.6
  Top Layer w10: R17.1 1475,335.67 1485,345.67 Q4.3@1485,360.04
NetQ5_1: Q5.1 R26.1 R28.2 | length 167.5
  Top Layer w10: R26.1@211.61,615 R26.1 218.39,608.23 295,608.23 298.23,605 Q5.1@375,605
NetQ6_1: Q6.1 R27.1 R29.2 | length 172.6
  Top Layer w10: Q6.1@310,265 324.37,265 341.14,281.77 R29.2 473.39,281.77 R27.1
NetR18_1: R18.1 W1.1 | length 99.5
  Top Layer w10: R18.1 2370,115.81 W1.1
OUT: P1.3 Q6.3 R25.1 | length 187.3
  Top Layer w10: P1.3 196.77,395 R25.1 Q6.3@210,310
PWRKEY: R19.1 U2.7 | length 515.2
  Top Layer w10: R19.1 2116.61,1286.93 2130.71,1272.83 2176.33,1272.83 2465.43,983.73 2465.43,982.21 2481.93,965.71 U2.7
RXD: P1.1 Q2.3 R6.1 U4.21 | length 1364.5
  Top Layer w10: P1.1@124.53,170.47 P1.1 743.83,195 749.68,200.86 749.68,295.32 730,315 695,315 R6.1 685,500 ; U4.21@675,734.13 U4.21 685,735.39 685,500 ; Q2.3@762.6,489.92 695.08,489.92 685,500
STATUS: Q4.1 U2.25 | length 1011.7
  Top Layer w10: Q4.1@1522.4,439.96 1645.06,439.96 1800.1,595 1885,595 1968.66,511.34 1968.66,506.34 v1(2055,420) ; U2.25 2308.7,346.3 v1(2309.35,345.65) v1@2310,345
  Bottom Layer w10: v1(2055,420) 2129.35,345.65 v1(2309.35,345.65)
TXD: P1.2 Q1.2 U4.20 | length 1674.9
  Top Layer w10: P1.2 104.53,290.47 144.53,290.47 210,225 485,225 550,290 550,815 575,840 680.39,840 684.71,835.68 749.32,835.68 780,805 780,652.52 932.6,499.92 932.6,488.45 Q1.2@925.98,481.84
USB_D+: D11.2 J2.3 L3.1 P3.4 | length 2066.1
  Top Layer w8: J2.3@1821.11,225 1821.11,301.11 L3.1@1845,325
  Top Layer w10: J2.3 J2.3@1823.35,203.03 ; L3.1 1883.5,328.5 1910,355 v1(1910,530) ; D11.2 1852.48,465 1904.22,465 1907.07,467.85
  Bottom Layer w10: P3.4 525,140 1385,140 1775,530 v1(1910,530)
USB_D-: D11.1 J2.2 L3.2 P3.5 | length 1672.8
  Top Layer w8: L3.2@1778.07,325 1795.04,308.03 J2.2
  Top Layer w10: D11.1 1767.98,455.3 1740.3,455.3 v1(1715,430) 1715,350 1740,325 1759.5,325 1760.13,325.63 1775.2,325.63 L3.2
  Bottom Layer w10: P3.5 605,120 1405,120 v1(1715,430)
USB_DM: L3.3 U2.60 | length 699.1
  Top Layer w10: L3.3 v1(1778.07,408.07) ; v1(2339.4,440.46) 2339.8,440.86 2339.8,481.06 U2.60
  Bottom Layer w10: v1(1778.07,408.07) 1845,475 2315.79,475 2334.89,455.9 2334.89,453.32 2336.72,451.49 2336.72,443.14 v1(2339.4,440.46)
USB_DP: L3.4 U2.59 | length 555.8
  Top Layer w10: L3.4 1854.84,360 1855,360.16 v1(1855,410) ; v1(2290,440) 2290,471.07 2292.95,474.02 U2.59
  Bottom Layer w10: v1(1855,410) 1892,447 2279.21,447 2286.21,440 v1(2290,440)
USB_VBUS: J2.1 P3.6 U2.61 | length 2162.6
  Top Layer w10: v1(1680,350) 1769.45,260.55 J2.1 ; v1(2387.44,442.44) U2.61
  Bottom Layer w10: P3.6 1400,70 v1(1680,350) 1833,503 2326.88,503 v1(2387.44,442.44)
USIM_CKL: R14.1 U2.13 | length 718.8
  Top Layer w10: v1(1690,742) 1690.36,742 1943.36,995 2192.79,995 2222.09,965.71 U2.13
  Bottom Layer w10: v1(1690,742) 1691.09,742 1710,760.91 R14.1
USIM_DATA: R15.1 U2.11 | length 598
  Top Layer w10: v1(1875,742) 1877,742 2056.65,921.65 2302.84,921.65 2308.7,927.51 U2.11
  Bottom Layer w10: v1(1875,742) 1875,743.79 1885,753.79 R15.1
USIM_DET: J1.C6 R12.2 U2.79 U3.1 | length 1371.9
  Top Layer w10: U2.79 2363.82,761.18 v1(2365,760)
  Bottom Layer w10: R12.2 1620,899.14 1625.86,905 1684.14,905 1700,920.86 1700,968.58 1700,1146.82 1788.18,1235 2009.64,1235 2066.81,1177.83 U3.1 2069.49,1152.91 2091.41,1152.91 2130,1114.32 2130,995 v1(2365,760)
USIM_RST: R13.1 U2.12 | length 951.4
  Top Layer w10: v1(1525,750) 1550,775 1695,775 1935,1015 2259.54,1015 2265.39,1009.14 U2.12
  Bottom Layer w10: v1(1525,750) 1535,760 R13.1
USIM_VDD: C15.2 J1.C1 R11.1 U2.14 U3.3 | length 1539.2
  Top Layer w10: v1(2110,850) 2111.54,851.54 U2.14
  Bottom Layer w10: J1.C1 1495.86,968.58 1490,962.72 1490,720.86 1495.86,715 1947.6,715 ; R11.1 1805,785 1805,710 ; C15.2 1984.76,752.16 1947.6,715 ; U3.3 2069.49,1101.73 2082.68,1101.73 2105,1079.41 2105,862.86 2107.32,860.54 2107.32,852.68 v1(2110,850) ; v1@2110,848.65 2105,843.65 2105,772.45 2047.55,715 1947.6,715
VBAT: C6.2 C7.2 C8.2 C9.2 C10.2 C11.2 C12.1 C13.2 C19.1 D3.C D5.A D6.A L1.2 R6.2 R7.2 R21.2 R24.2 R25.2 U2.42 U2.43 U4.5V | length 8258.2
  Top Layer w10: R25.2 R24.2 353.39,405.86 359.24,400 465,400 500,435 v1(500,735) ; v1(580,735) 580,348.7 676.93,251.77 R6.2 R6.2@693.07,251.77 ; v1(840,735) 842.68,732.32 855.86,732.32 1214.57,373.62 D5.A 1214.57,100.43 1240,75 1410,75 1419.57,84.57 D6.A ; 1200,1433.91 1205.86,1439.76 U4.5V U4.5V@1319.13,1430 ; C19.1 2314.53,1432.24 R21.2 ; U2.42 U2.43 2855.42,808.23 2858.65,805 v1(2860,805)
  Top Layer w20: v1(1140,1543) 1218.37,1543 1220.37,1545 1297.65,1545 1309.37,1533.28 U4.5V ; U4.5V@1319.13,1430 1470,1430 1605,1430 1695,1430 C8.2 C9.2 C10.2 R21.2
  Bottom Layer w10: C11.2 C13.2 ; 495,1529.14 500.86,1535 ; L1.2 L1.2@1145,1363.43 ; C12.1@1145,1169.61 1178.52,1136.08 C12.1@1189.61,1125 ; C12.1@1150,1107.56 C12.1
  Bottom Layer w20: C11.2 v1(580,735) 1020,735 1150,865 C12.1@1150,1107.56 ; R7.2 495,1529.14 ; 500.86,1535 508.86,1543 v1(1140,1543) 1140,1381.57 L1.2 ; v1@1140,1544.85 1141.85,1543 1737,1543 2475,805 v1(2860,805) ; C12.1@1145,1169.61 L1.2@1145,1363.43 ; C12.1 C12.1@1189.61,1125
VDD_EXT: C2.2 C3.2 D7.C R3.2 R4.2 R5.2 R12.1 R20.1 U2.24 U2.82 W1.2 | length 3534.1
  Top Layer w10: C3.2 889.53,249.53 R4.2 R5.2 975.24,249.76 C2.2 ; v1(1110,440) 1185,365 1185,250.86 1179.14,245 R3.2 1125.24,249.76 C2.2 ; v1(1615,535) v1(1615,742) ; U2.24 2265.2,398.58 2265.2,240.2 v1(2265,240) 2223.39,198.39 R20.1 2165,109.19 W1.2 2073.27,105 D7.C 2050,74.02 2025.47,49.49 1195.51,49.49 1050,195 C2.2 ; U2.82 v1(2363.82,593)
  Bottom Layer w10: v1(1110,440) 1130,420 1500,420 v1(1615,535) ; v1(1615,742) 1615,790 R12.1 ; v1(2265,240) 2415,390 2415,543.82 2365.82,593 v1(2363.82,593)
Vin: F1.1 P1.6 | length 105.4
  Bottom Layer w10: F1.1 F1.1@100,789.8
  Bottom Layer w20: P1.6 F1.1@100,789.8
pads on no net: J1.S/W J2.4 U2.3 U2.4 U2.5 U2.6 U2.8 U2.9 U2.15 U2.20 U2.21 U2.22 U2.23 U2.26 U2.28 U2.29 U2.30 U2.31 U2.32 U2.33 U2.44 U2.49 U2.50 U2.51 U2.52 U2.53 U2.54 U2.55 U2.56 U2.57 U2.58 U2.62 U2.63 U2.64 U2.65 U2.66 U2.67 U2.68 U2.69 U2.74 U2.75 U2.76 U2.77 U2.78 U2.80 U2.81 U2.83 U2.84 U2.85 U2.86 U2.87 U2.96 U2.97 U2.98 U2.99 U2.100 U2.101 U2.102 U2.103 U2.104 U2.105 U2.106 U2.107 U2.108 U2.109 U4.0 U4.1 U4.2 U4.3 U4.3.3 U4.4 U4.5 U4.6 U4.7 U4.8
copper on no net: | length 9030
  Top Layer w10: 0,0 2945,0 2945,1570 0,1570 0,0

## Polygon pours and split planes (outlines as drawn)
GND on Top Layer "GND_L01_P014" (solid, remove dead copper, pour order 14): 0,0 5,5 2610,5 2610,345 2810,345 2810,0 2945,0 2945,1570 2780,1570 2780,990 2460,990 2460,1570 0,1570
GND on Top Layer "NONET_L01_P006" (solid, remove dead copper, shelved, pour order 6): 5,-5 10,0 2665,0 2665,335 2670,330 2820,330 2820,170 2785,135 2790,130 2790,70 2694.29,70 2689.06,64.76 2664.53,64.76 2664.53,0.47 2665,0 2670,5 2950,5 2950,960 2915,995 2450,995 2450,1355 2460,1345 2640,1345 2640,1495 2645,1500 2650,1495 2950,1495 2950,1565 5,1565
GND on Bottom Layer "GND_L02_P015" (solid, remove dead copper, pour order 15): 0,0 2610,0 2610,345 2810,345 2810,0 2945,0 2945,1570 2780,1570 2780,990 2460,990 2460,1570 0,1570
no net on Bottom Layer "NONET_L02_P009" (solid, shelved, pour order 9): 2950,995 2950,1005 2950,945
no net on Bottom Layer "NONET_L02_P008" (solid, shelved, pour order 8): 5,-5 10,0 2950,0 2950,70 2940,80 2935,75 2615,75 2615,325 2630,340 2815,340 2815,75 2820,70 2825,75 2950,75 2950,945 2950,995 2450,995 2450,1315 2485,1350 2645,1350 2645,1480 2640,1485 2780,1485 2780,1015 2800,995 2950,995 2950,1565 2945,1570 2940,1565 5,1565

## Silkscreen, mask and mechanical layers (free items; w line width, h text height)
Top Overlay:
  drawing of 12 lines, arcs and shapes, not listed
  text "Rovi / V1.0" at 165,1365 h60
Bottom Overlay:
  text "VCC" at 325,635 h60
  text "GND" at 325,550 h60
  text "ACC" at 330,470 h60
  text "OUT" at 320,360 h60
  text "VBUS" at 700,360 h60 r90
  text "TXD" at 330,265 h60
  text "RXD" at 335,170 h60
  text "D+" at 425,145 h60 r270
  text "D-" at 535,140 h60 r270